# Altium PCB PCB1.PcbDoc
Units mm, origin at the board's own origin, x right, y up, seen from the top; angles counter-clockwise.
Board outline 100.75 x 82 mm, 2 copper layers (Top Layer, Bottom Layer), stack 1.571 mm thick; 98 components, 125 nets, 437 pads, 46 vias.
Unrouted connection lines stored in the file: 3.
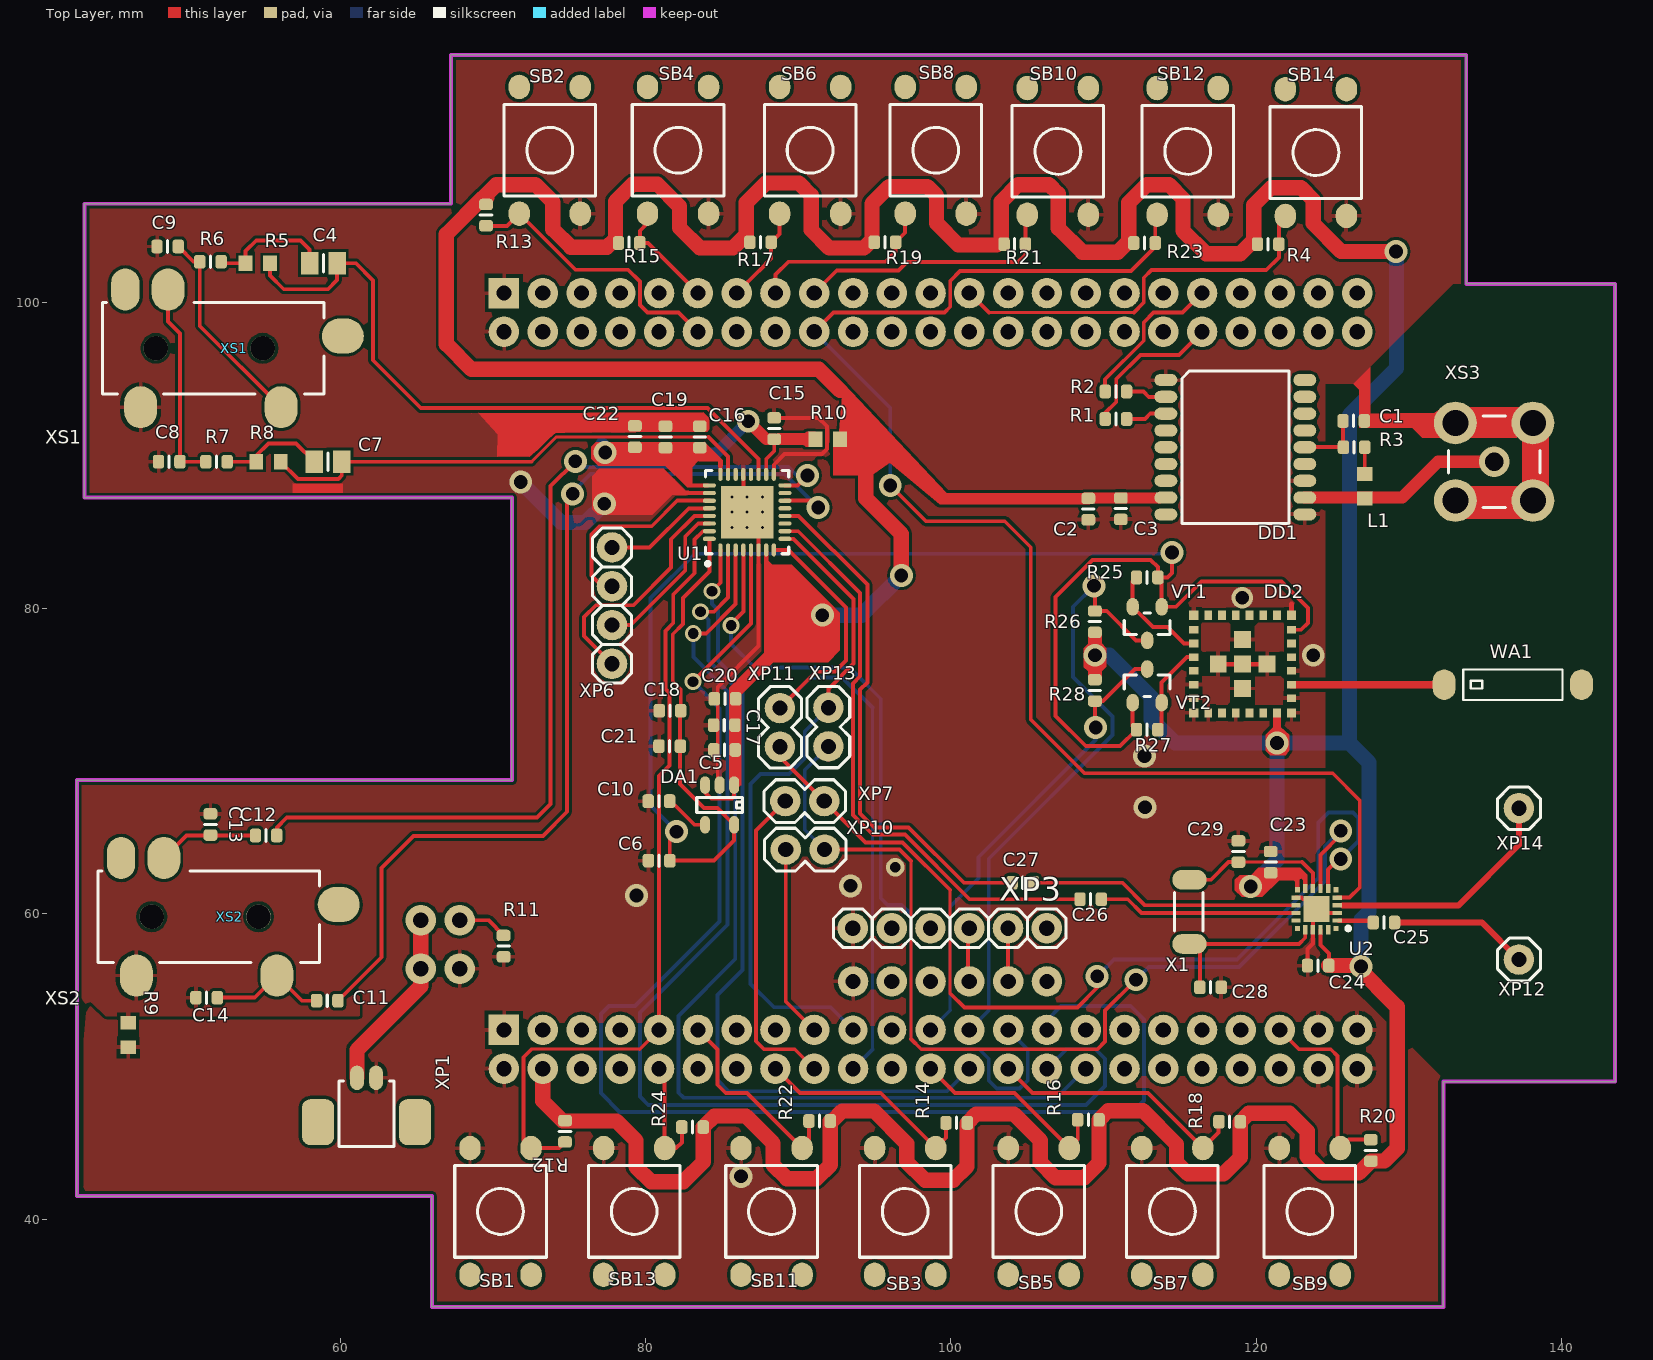
[diagram p0: Top Layer view]
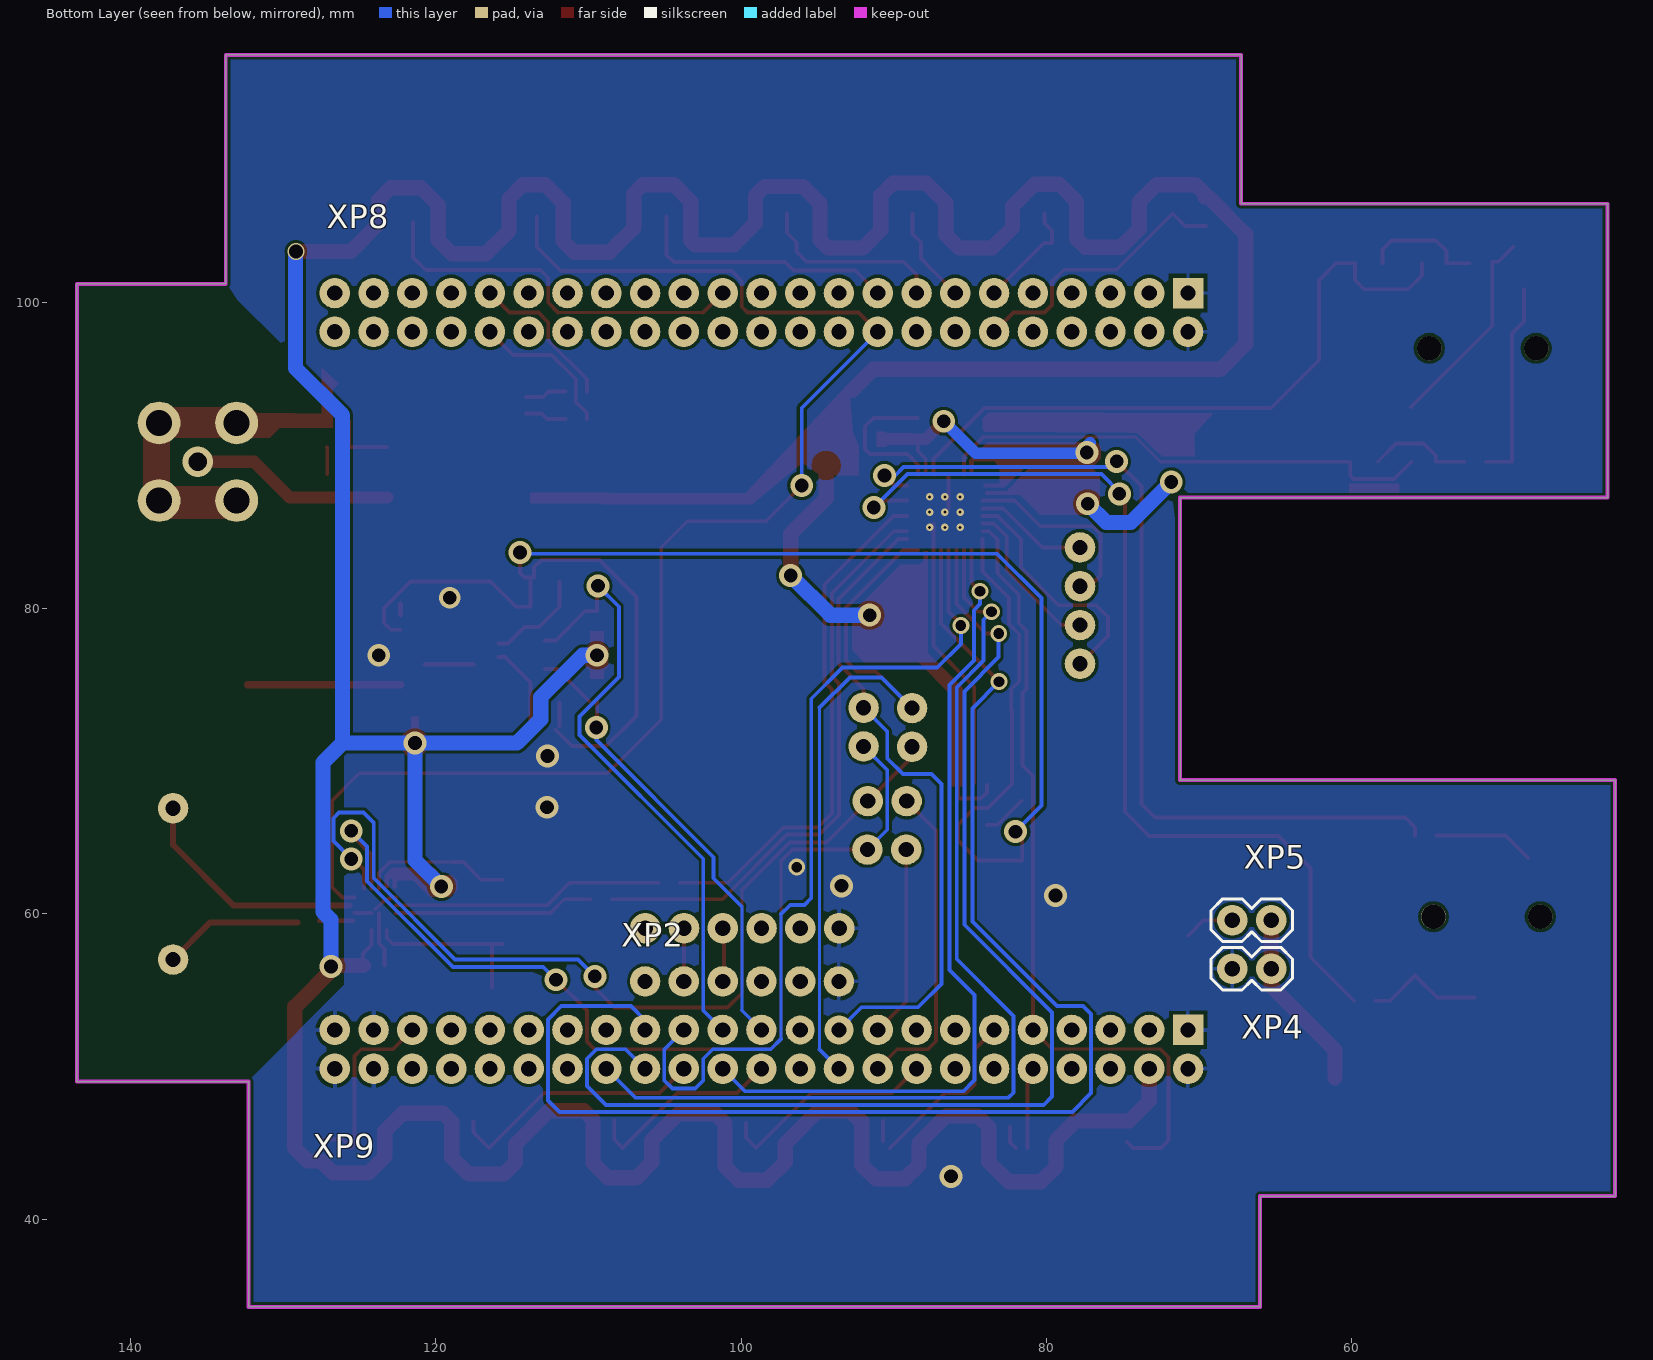
[diagram p1: Bottom Layer view, seen from below]
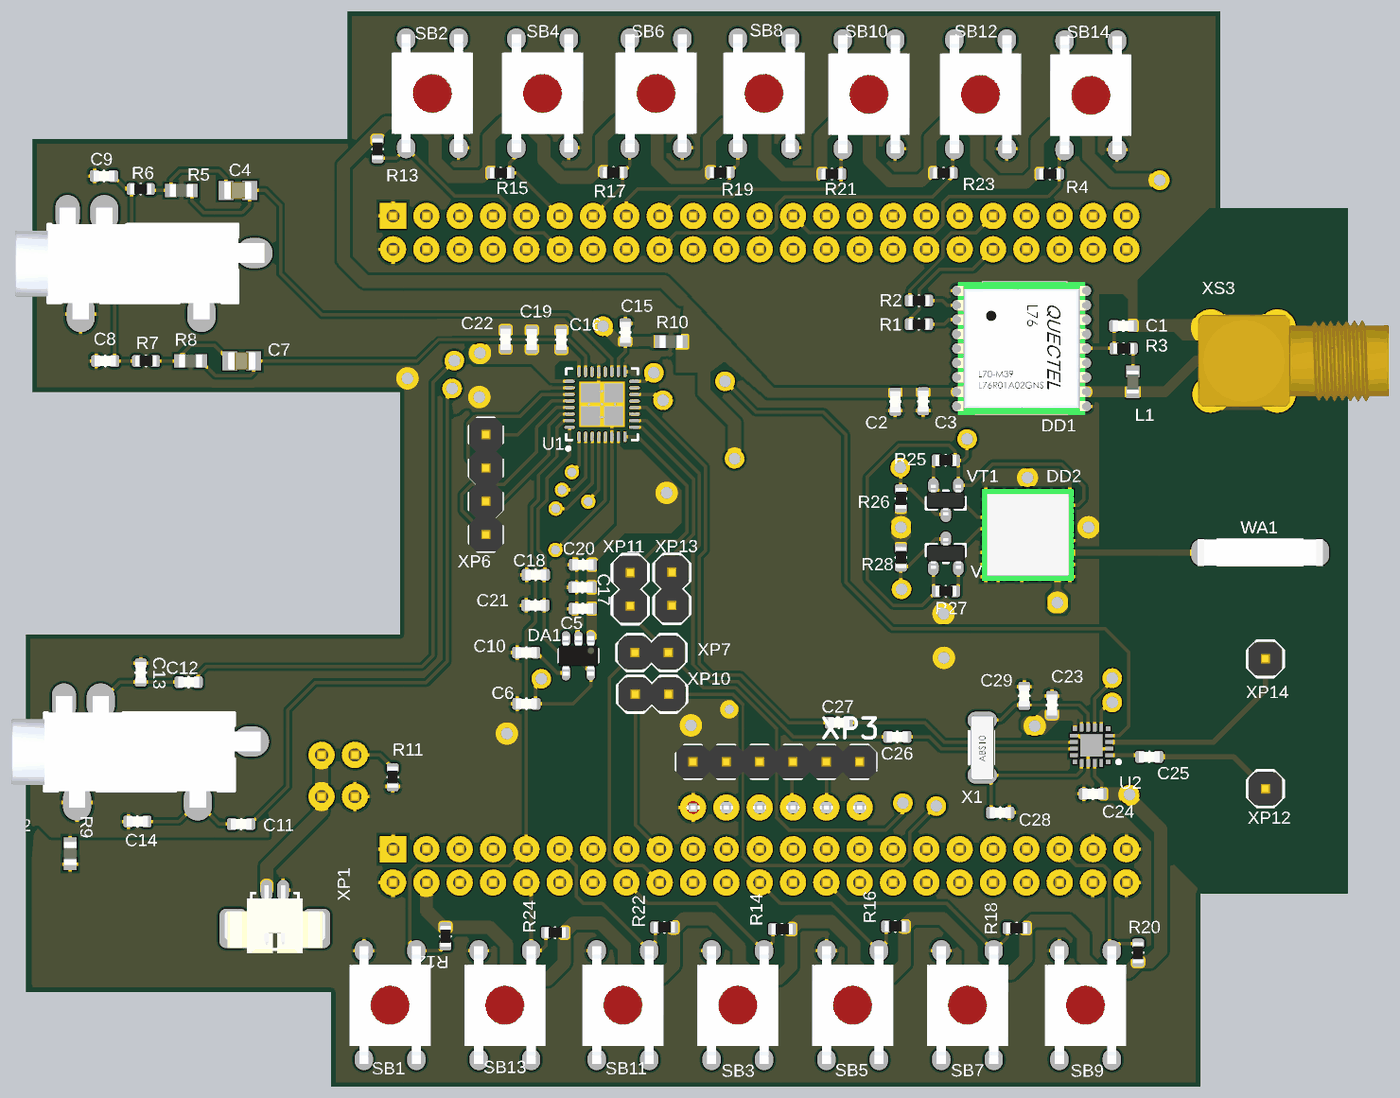
[diagram p2: 3D render of the assembled board from above, using the file's embedded part models]
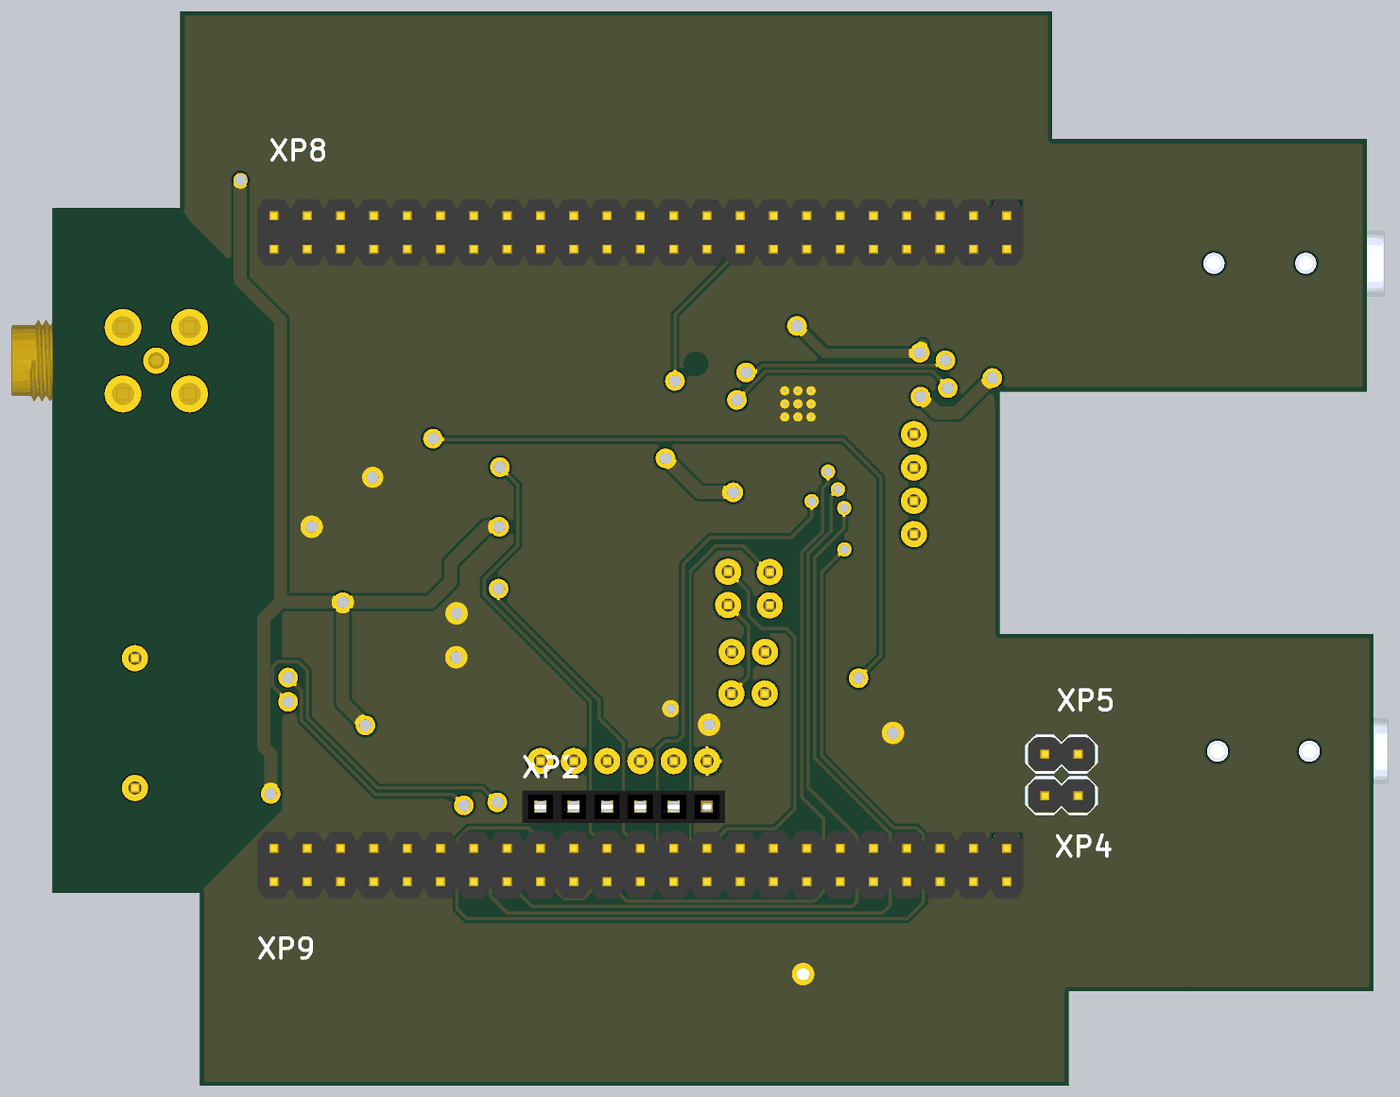
[diagram p3: 3D render of the assembled board from below, using the file's embedded part models]

## Layer stack, top to bottom
Top Solder: solder mask 0.0102, Solder Resist, Dk 3.5
Top Layer: signal copper 0.0356
Dielectric 1: dielectric 1.5, FR-4, Dk 4.8
Bottom Layer: signal copper 0.0356
Bottom Solder: solder mask 0.0102, Solder Resist, Dk 3.5

## Board outline
42.75,41.5 66,41.5 66,34.25 132.25,34.25 132.25,49 143.5,49 143.5,101.25 133.75,101.25 133.75,116.25 67.25,116.25 67.25,106.5 43.25,106.5 43.25,87.25 71.25,87.25 71.25,68.75 42.75,68.75

## Design rules (kind name [scope] priority, off if disabled: settings)
Clearance [All] p1: gap=0.2
PolygonConnect PolygonConnect_1 [IsVia] p1: connectstyle=Direct reliefconductorwidth=0.254 reliefentries=4 polygonreliefangle="90 Angle" airgapwidth=0.254
PolygonConnect [All] p2: connectstyle=Relief reliefconductorwidth=0.254 reliefentries=4 polygonreliefangle="90 Angle" airgapwidth=0.254
RoomDefinition Radio [InComponentClass('Radio')] p1: confinementstyle=ConfineIn formatcopy=TRUE lockcomponents=FALSE outline 0,0 50.8,0 50.8,25.4 0,25.4
RoutingVias [All] p1: holewidth=0.711 width=1.27 viastyle="Through Hole" minholewidth=0.711 minwidth=1.27 maxholewidth=0.711 maxwidth=1.27
SilkToSilkClearance [All] p1: silktosilkclearance=0.2
SolderMaskExpansion [All] p1: expansion=0.102
Width [All] p1: maxlimit=2 minlimit=0.254 preferedwidth=0.254
28 further rules are at their usual default settings.

## Classes and differential pairs
component class Sheet2: DD2 R4 R12 R13 R14 R15 R16 R17 R18 R19 R20 R21 R22 R23 R24 R25 R26 R27 R28 SB1 SB2 SB3 SB4 SB5 SB6 SB7 SB8 SB9 SB10 SB11 SB12 SB13 SB14 VT1 VT2 WA1
component class Sheet1: C4 C5 C6 C7 C8 C9 C10 C11 C12 C13 C14 C15 C16 C17 C18 C19 C20 C21 C22 DA1 R5 R6 R7 R8 R9 R10 R11 U1 XP1 XP2 XP3 XP4 XP5 XP6 XP8 XP9 XS1 XS2
component class GPS: C1 C2 C3 DD1 L1 R1 R2 R3 XS3
component class Radio: C23 C24 C25 C26 C27 C28 C29 U2 X1 XP7 XP10 XP11 XP12 XP13 XP14

## Components (designator, comment, footprint, x,y, rotation, side; value= is the part's Value field where it differs from the comment)
C1 "100nF" CAP0603R 126.375,92.275 r0 top
C2 "100nF" CAP0603R 109,86.5 r270 top
C3 "4.7uF" CAP0603R 111.125,86.525 r90 top
C4 "47uF" CAPC2012X140N 58.9,102.6 r0 top
C5 "1uF" CAP0603R 85.175,70.725 r180 top
C6 "2.2uF" CAP0603R 80.885,63.475 r0 top
C7 "47uF" CAPC2012X140N 59.2,89.6 r0 top
C8 "47pF" CAP0603R 48.8,89.6 r180 top
C9 "47pF" CAP0603R 48.7,103.7 r180 top
C10 "100nF" CAP0603R 80.875,67.375 r0 top
C11 "100nF" CAP0603R 59.15,54.3 r0 top
C12 "100nF" CAP0603R 55.15,65.125 r0 top
C13 "47pF" CAP0603R 51.5,65.85 r90 top
C14 "47pF" CAP0603R 51.25,54.5 r180 top
C15 "10uF" CAP0603R 88.425,91.775 r270 top
C16 "100nF" CAP0603R 83.55,91.225 r90 top
C17 "10uF" CAP0603R 85.15,72.35 r0 top
C18 "10uF" CAP0603R 81.6,73.3 r0 top
C19 "100nF" CAP0603R 81.3,91.225 r90 top
C20 "100nF" CAP0603R 85.2,74.075 r180 top
C21 "100nF" CAP0603R 81.575,70.975 r180 top
C22 "10uF" CAP0603R 79.3,91.25 r270 top
C23 "100nF" CAP0603R 120.938,63.375 r270 top
C24 "22nF" CAP0603R 124.05,56.6 r180 top
C25 "1nF" CAP0603R 128.35,59.425 r180 top
C26 "100nF" CAP0603R 109.15,60.95 r0 top
C27 "100nF" CAP0603R 104.7,62.025 r0 top
C28 "22pF" CAP0603R 117,55.175 r180 top
C29 "22pF" CAP0603R 118.825,64.075 r270 top
DA1 "LDS3985M18R" SOT23-5 84.85,67.125 r270 top
DD1 "SIM68M" SIM68M 118.625,90.55 r180 top
DD2 "TiWi-uB2" TiWi-uB2 116.2,79.675 r270 top
L1 "27NH" INDC1608X75N 127.1,88 r270 top
R1 "100" RES0603R 110.8,92.4 r0 top
R2 "100" RES0603R 110.8,94.2 r180 top
R3 "10" RES0603R 126.4,90.55 r0 top
R4 "10k" RES0603R 120.775,103.85 r180 top
R5 "0" RESC1608X55N 54.6,102.6 r0 top
R6 "33" RES0603R 51.5,102.7 r0 top
R7 "33" RES0603R 51.9,89.6 r0 top
R8 "0" RESC1608X55N 55.3,89.6 r0 top
R9 "0" RESC1608X55N 46.125,52.05 r90 top
R10 "0" RESC1608X55N 91.925,91.075 r180 top
R11 "75k" RES0603R 70.7,57.875 r270 top
R12 "10k" RES0603R 74.725,45.75 r90 top
R13 "10k" RES0603R 69.55,105.75 r90 top
R14 "10k" RES0603R 100.375,46.3 r0 top
R15 "10k" RES0603R 78.925,103.925 r180 top
R16 "10k" RES0603R 109,46.5 r0 top
R17 "10k" RES0603R 87.525,103.975 r180 top
R18 "10k" RES0603R 118.25,46.375 r0 top
R19 "10k" RES0603R 95.675,103.975 r180 top
R20 "10k" RES0603R 127.5,44.5 r270 top
R21 "10k" RES0603R 104.175,103.85 r180 top
R22 "10k" RES0603R 91.4,46.425 r0 top
R23 "10k" RES0603R 112.675,103.925 r180 top
R24 "10k" RES0603R 83.075,46.025 r0 top
R25 "10k" RES0603R 112.85,82.025 r0 top
R26 "10k" RES0603R 109.425,79.125 r270 top
R27 "10k" RES0603R 112.85,72.05 r180 top
R28 "10k" RES0603R 109.425,74.625 r90 top
SB1 "RESET" DTSMW-3.8N 70.5,40.5 r270 top
SB2 "1" DTSMW-3.8N 73.725,110 r90 top
SB3 "LEFT" DTSMW-3.8N 97,40.5 r270 top
SB4 "2" DTSMW-3.8N 82.125,110 r90 top
SB5 "RIGHT" DTSMW-3.8N 105.75,40.5 r270 top
SB6 "3" DTSMW-3.8N 90.775,110 r90 top
SB7 "UP" DTSMW-3.8N 114.5,40.5 r270 top
SB8 "4" DTSMW-3.8N 99,110 r90 top
SB9 "DOWN" DTSMW-3.8N 123.5,40.5 r270 top
SB10 "5" DTSMW-3.8N 107,109.925 r90 top
SB11 "ENTER" DTSMW-3.8N 88.25,40.5 r270 top
SB12 "6" DTSMW-3.8N 115.5,109.925 r90 top
SB13 "POWER" DTSMW-3.8N 79.25,40.5 r270 top
SB14 "6" DTSMW-3.8N 123.9,109.85 r90 top
U1 "TLV320AIC3104IRHBT" RHB32-3450X3450TP 86.65,86.3 r90 top
U2 "Si4705-D60-GM" SLAB-QFN-20-1700x1700TP_V 123.95,60.3 r180 top
VT1 "2N7002" SOT23 112.85,79 r270 top
VT2 "2N7002" SOT23 112.85,74.925 r90 top
WA1 "7488910245" 7488910245 136.8,75 r0 top
X1 "32.768kHz" 5020 115.625,60.125 r90 top
XP1 "FH02MR-SMT" FH02MR-SMT 61.725,49.25 r0 top
XP2 "PBS" PBS-06 99.935,55.565 r0 bottom
XP3 "PLS" PLS-06 99.925,59.05 r0 top
XP4 "PLS" PLS-02 66.55,56.4 r0 bottom
XP5 "PLS" PLS-02 66.55,59.575 r180 bottom
XP6 "PLS" PLS-04 77.8,80.175 r270 top
XP7 "PLS" PLS-02 90.425,67.375 r0 top
XP8 "PLS" PLD-46#1 98.665,99.38 r0 bottom
XP9 "PLS" PLD-46#2 98.665,51.12 r0 bottom
XP10 "PLS" PLS-02 90.45,64.2 r180 top
XP11 "PLS" PLS-02 88.8,72.2 r270 top
XP12 "PLS" PLS-01 137.2,57 r90 top
XP13 "PLS" PLS-02 91.975,72.225 r90 top
XP14 "PLS" PLS-01 137.2,66.9 r90 top
XS1 "PJ-W37-05C" PJ-W37-05C 44.425,97.025 r0 top
XS2 "PJ-W37-05C" PJ-W37-05C 44.15,59.8 r0 top
XS3 "73100-0114" 73100-0114 135.575,89.6 r180 top

## Footprints (in the part's own frame and the unit in brackets; to place one, negate y for a bottom-side part, rotate by r counter-clockwise, add the part's x,y. Pads: shape width x height; smd on the part's side, far side on the other; paste and mask are expansions set on the pad)
5020 [mm]
  oval 1.3x2.25 smd mask+0.1: 1(-2.1,0) 2(2.1,0)
  silkscreen extent -1.25,-0.88 1.25,1, body extent -2.45,-0.9 2.45,0.9, height 1.01
73100-0114 [mm] "Connector; RF Coaxial, MCX, Thru-Hole; 5 Position; Right-Angle"
  round 2 hole 1.2: 1(0,0)
  round 2.8 hole 1.7: 2(-2.54,-2.54) 3(2.54,-2.54) 4(2.54,2.54) 5(-2.54,2.54)
  silkscreen extent -3,-3 3,3, body extent -11,-3.5 3.5,3.5, height 9.91
7488910245 [mm]
  oval 1.5x2 smd: 1(-4.5,0) 2(4.5,0)
  silkscreen extent -3.25,-1 3.25,1, body extent -4.77,-1.02 4.77,1.02, height 1.05
CAP0603R [mm] "capacitor 0603 reflow soldering"
  rrect50% 0.75x0.9 smd: 1(-0.7,0) 2(0.7,0)
  silkscreen extent 0,-0.38 0,0.38, body extent -0.8,-0.4 0.8,0.4, height 0.81
CAPC2012X140N [mm] "Chip Capacitor, Body 2.0x1.25mm, IPC Medium Density"
  rect 1.15x1.45 smd: 1(-0.9,0) 2(0.9,0)
  silkscreen extent 0,-0.58 0,0.57, body extent -1.05,-0.67 1.05,0.68, height 1.3
DTSMW-3.8N [mm] "Surface Mount DTSM Tact Switch; Body 6 x 6 mm (LxW)"
  oval 1.6x1.4 smd mask+0.1: 1(-4.15,2) 2(4.15,2) 3(-4.15,-2) 4(4.15,-2)
  silkscreen extent -3,-3 3,3, body extent -4.49,-3.1 4.49,3.1, height 4.01
FH02MR-SMT [mm]
  oval 0.9x1.6 smd mask+0.1: 1(-0.625,0) 2(0.625,0)
  rrect50% 2.1x3 smd mask+0.1: 3(-3.175,-2.9) 4(3.175,-2.9)
  silkscreen extent -1.8,-4.5 1.8,-0.2, body extent -3.82,-4.8 3.83,0.4, height 3.52
INDC1608X75N [mm] "Chip Inductor, 2-Leads, EIA 0603, Metric 1608, Body 1.6x0.8mm, IPC Medium Density"
  rect 0.9x1 smd: 1(-0.8,0) 2(0.8,0)
  body extent -0.87,-0.47 0.88,0.48, height 0.7
PBS-06 [mm]
  round 2 hole 1 unplated: 1(-6.35,0) 2(-3.81,0) 3(-1.27,0) 4(1.27,0) 5(3.81,0) 6(6.35,0)
  body extent -7.75,-1.25 7.74,1.25, height 8.51
PJ-W37-05C [mm]
  round 1.6 hole 1.6 unplated: 0(3.5,0) 0(10.5,0)
  oval 2.15x2.75 smd: 1(2.5,-3.85) 2(11.7,-3.85) 3(4.3,3.85)
  oval 2.75x2.3 smd: 4(15.75,0.8)
  oval 1.85x2.75 smd: 5(1.5,3.85)
  silkscreen extent 0,-3 14.5,3, body extent -2.5,-4.25 16.5,4.25, height 5.02
PLD-46#1 [mm]
  rect 2x2 hole 1 unplated: 1(-27.94,-1.27)
  round 2 hole 1 unplated: 2(-27.94,1.27) 3(-25.4,-1.27) 4(-25.4,1.27) 5(-22.86,-1.27) 6(-22.86,1.27) 7(-20.32,-1.27) 8(-20.32,1.27) 9(-17.78,-1.27) 10(-17.78,1.27) 11(-15.24,-1.27) 12(-15.24,1.27) 13(-12.7,-1.27) 14(-12.7,1.27) 15(-10.16,-1.27) 16(-10.16,1.27) 17(-7.62,-1.27) 18(-7.62,1.27) 19(-5.08,-1.27) 20(-5.08,1.27) 21(-2.54,-1.27) 22(-2.54,1.27) 23(0,-1.27) 24(0,1.27) 25(2.54,-1.27) 26(2.54,1.27) 27(5.08,-1.27) 28(5.08,1.27) 29(7.62,-1.27) 30(7.62,1.27) 31(10.16,-1.27) 32(10.16,1.27) 33(12.7,-1.27) 34(12.7,1.27) 35(15.24,-1.27) 36(15.24,1.27) 37(17.78,-1.27) 38(17.78,1.27) 39(20.32,-1.27) 40(20.32,1.27) 41(22.86,-1.27) 42(22.86,1.27) 43(25.4,-1.27) 44(25.4,1.27) 45(27.94,-1.27) 46(27.94,1.27)
  body extent -29.21,-2.54 29.21,2.54, height 8.45
PLD-46#2 [mm]
  rect 2x2 hole 1 unplated: 1(-27.94,-1.27)
  round 2 hole 1 unplated: 2(-27.94,1.27) 3(-25.4,-1.27) 4(-25.4,1.27) 5(-22.86,-1.27) 6(-22.86,1.27) 7(-20.32,-1.27) 8(-20.32,1.27) 9(-17.78,-1.27) 10(-17.78,1.27) 11(-15.24,-1.27) 12(-15.24,1.27) 13(-12.7,-1.27) 14(-12.7,1.27) 15(-10.16,-1.27) 16(-10.16,1.27) 17(-7.62,-1.27) 18(-7.62,1.27) 20(-5.08,1.27) 22(-2.54,1.27) 23(0,-1.27) 24(0,1.27) 25(2.54,-1.27) 26(2.54,1.27) 27(5.08,-1.27) 28(5.08,1.27) 29(7.62,-1.27) 30(7.62,1.27) 31(10.16,-1.27) 32(10.16,1.27) 33(12.7,-1.27) 34(12.7,1.27) 35(15.24,-1.27) 36(15.24,1.27) 37(17.78,-1.27) 38(17.78,1.27) 39(20.32,-1.27) 40(20.32,1.27) 41(22.86,-1.27) 42(22.86,1.27) 43(25.4,-1.27) 44(25.4,1.27) 45(27.94,-1.27) 46(27.94,1.27)
  round 1.9 hole 1 unplated: 19(-5.08,-1.27) 21(-2.54,-1.27)
  body extent -29.21,-2.54 29.21,2.54, height 8.45
PLS-01 [mm]
  round 2 hole 1: 1(0,0)
  silkscreen extent -1.4,-1.4 1.4,1.4, body extent -1.27,-1.27 1.27,1.27, height 8.45
PLS-02 [mm]
  round 2 hole 1: 1(-1.27,0) 2(1.27,0)
  silkscreen extent -2.67,-1.4 2.67,1.4, body extent -2.54,-1.27 2.54,1.27, height 8.45
PLS-04 [mm]
  round 2 hole 1: 1(-3.81,0) 2(-1.27,0) 3(1.27,0) 4(3.81,0)
  silkscreen extent -5.08,-1.27 5.08,1.27, body extent -5.08,-1.27 5.08,1.27, height 8.45
PLS-06 [mm]
  round 2 hole 1: 1(-6.35,0) 2(-3.81,0) 3(-1.27,0) 4(1.27,0) 5(3.81,0) 6(6.35,0)
  silkscreen extent -7.62,-1.27 7.62,1.27, body extent -7.62,-1.27 7.62,1.27, height 8.45
RES0603R [mm] "resistor 0603 reflow soldering"
  rrect50% 0.75x0.9 smd: 1(-0.7,0) 2(0.7,0)
  silkscreen extent 0,-0.38 0,0.38, body extent -0.8,-0.4 0.8,0.4, height 0.46
RESC1608X55N [mm] "Chip Resistor, EIA 0603, Metric 1608, Body 1.6x0.8mm, IPC Medium Density"
  rect 0.9x1 smd: 1(-0.8,0) 2(0.8,0)
  body extent -0.87,-0.47 0.88,0.48, height 0.55
RHB32-3450X3450TP [mm] "QFN, 32-Leads, Body 5x5mm, Pitch 0.5mm, Thermal Pad 3.45x3.45mm, TI Recommended"
  oval 0.85x0.28 smd paste-0.025 mask+0.07: 1(-2.475,1.75) 2(-2.475,1.25) 3(-2.475,0.75) 4(-2.475,0.25) 5(-2.475,-0.25) 6(-2.475,-0.75) 7(-2.475,-1.25) 8(-2.475,-1.75) 17(2.475,-1.75) 18(2.475,-1.25) 19(2.475,-0.75) 20(2.475,-0.25) 21(2.475,0.25) 22(2.475,0.75) 23(2.475,1.25) 24(2.475,1.75)
  oval 0.28x0.85 smd paste-0.025 mask+0.07: 9(-1.75,-2.475) 10(-1.25,-2.475) 11(-0.75,-2.475) 12(-0.25,-2.475) 13(0.25,-2.475) 14(0.75,-2.475) 15(1.25,-2.475) 16(1.75,-2.475) 25(1.75,2.475) 26(1.25,2.475) 27(0.75,2.475) 28(0.25,2.475) 29(-0.25,2.475) 30(-0.75,2.475) 31(-1.25,2.475) 32(-1.75,2.475)
  rect 3.45x3.45 smd paste-1.725 mask+0.07: 33(0,0)
  silkscreen extent -3.5,-2.72 2.73,2.72, body extent -2.57,-2.57 2.58,2.58, height 1
SIM68M [mm]
  oval 1.5x0.8 smd: 1(4.55,-4.4) 2(4.55,-3.3) 3(4.55,-2.2) 4(4.55,-1.1) 5(4.55,0) 6(4.55,1.1) 7(4.55,2.2) 8(4.55,3.3) 9(4.55,4.4) 10(-4.55,4.4) 11(-4.55,3.3) 12(-4.55,2.2) 13(-4.55,1.1) 14(-4.55,0) 15(-4.55,-1.1) 16(-4.55,-2.2) 17(-4.55,-3.3) 18(-4.55,-4.4)
  silkscreen extent -3.5,-5 3.5,5, body extent -4.85,-5.05 4.85,5.05, height 2.52
SLAB-QFN-20-1700x1700TP_V [mm] "QFN, 20-Leads, Body 3x3mm, Pitch 0.5mm, Thermal Pad 1.7x1.7mm"
  rect 0.34x0.34 smd: 1(-1.265,1.265) 6(-1.265,-1.265) 11(1.265,-1.265) 16(1.265,1.265)
  rect 0.61x0.28 smd: 2(-1.355,0.75) 3(-1.355,0.25) 4(-1.355,-0.25) 5(-1.355,-0.75) 12(1.355,-0.75) 13(1.355,-0.25) 14(1.355,0.25) 15(1.355,0.75)
  rect 0.28x0.61 smd: 7(-0.75,-1.355) 8(-0.25,-1.355) 9(0.25,-1.355) 10(0.75,-1.355) 17(0.75,1.355) 18(0.25,1.355) 19(-0.25,1.355) 20(-0.75,1.355)
  rect 1.7x1.7 smd: 21(0,0)
  silkscreen extent -2.19,1.14 -1.94,1.39, body extent -1.5,-1.5 1.5,1.5, height 0.6
SOT23 [mm]
  oval 1.15x0.8 smd mask+0.1: 1(-1.1,0.95) 2(-1.1,-0.95) 3(1.1,0)
  silkscreen extent -0.7,-1.5 0.7,1.5, body extent -1.16,-1.46 1.18,1.46, height 1
SOT23-5 [mm] "SOT23, 5-Leads, Body 2.9x1.6mm, Pitch 0.95mm, Lead Span 2.8mm, IPC High Density"
  oval 1.15x0.65 smd mask+0.1: 1(-1.3,0.95) 2(-1.3,0) 3(-1.3,-0.95) 4(1.3,-0.95) 5(1.3,0.95)
  silkscreen extent -0.5,-1.5 0.5,1.5, body extent -1.5,-1.5 1.5,1.5, height 1.3
TiWi-uB2 [mm]
  rect 0.5x0.6 smd: 1(1.075,-0.3) 2(1.975,-0.3) 3(2.875,-0.3) 4(3.775,-0.3) 5(4.675,-0.3) 6(5.575,-0.3) 13(5.575,6.1) 14(4.675,6.1) 15(3.775,6.1) 16(2.875,6.1) 17(1.975,6.1) 18(1.075,6.1)
  rect 0.6x0.5 smd: 7(6.525,0.65) 8(6.525,1.55) 9(6.525,2.45) 10(6.525,3.35) 11(6.525,4.25) 12(6.525,5.15) 19(0.125,5.15) 20(0.125,4.25) 21(0.125,3.35) 22(0.125,2.45) 23(0.125,1.55) 24(0.125,0.65)
  rect 1.1x1.1 smd: 25(3.325,1.3) 26(1.725,2.9) 27(3.325,2.9) 28(4.925,2.9) 29(3.325,4.5)
  rect 0.6x0.6 smd: 30(0.125,-0.3) 31(6.525,-0.3) 32(6.525,6.1) 33(0.125,6.1)
  body extent -0.17,-0.6 6.83,6.4, height 1.5

## Part data
C1 C2 C10 C11 C12 C16 C19 C20 C21 C23 C26 C27: library part CC0603_100NF_50V_10%_X7R, "SMD 0805 Capacitor"
C3: library part CC0603_4.7UF_6.3V_10%_X5R, "SMD 0805 Capacitor"
C4 C7: library part CC0805_47UF_6.3V_20%_X5R, "Non-polarised capacitor"
C5: library part CC0603_1UF_16V_10%_X7R, "SMD 0805 Capacitor"
C6: library part CC0603_2.2UF_6.3V_10%_X5R, "SMD 0805 Capacitor"
C8 C9 C13 C14: library part CC0603_47PF_50V_5%_NP0, "SMD 0805 Capacitor"
C15 C17 C18 C22: library part CC0603_10UF_6.3V_20%_X5R, "SMD 0805 Capacitor"
C24: library part CC0603_22NF_50V_10%_X7R, "SMD 0805 Capacitor"
C25: library part CC0603_1NF_50V_10%_X7R, "SMD 0805 Capacitor"
C28 C29: library part CC0603_22PF_50V_5%_NP0, "SMD 0805 Capacitor"
L1: library part IND0603_TDK_MMZ1608B601C, "Inductor"
R1 R2: library part R0603_100R_1%_0.1W_100PPM
R3: library part R0603_10R_1%_0.1W_200PPM
R4 R12 R13 R14 R15 R16 R17 R18 R19 R20 R21 R22 R23 R24 R25 R26 R27 R28: library part R0603_10K_1%_0.1W_100PPM
R5 R8 R9 R10: library part R0603_0R_JUMPER, "Resistor"
R6 R7: library part R0603_33R_1%_0.1W_100PPM
R11: library part R0603_75K_1%_0.1W_100PPM
SB1 SB2 SB3 SB4 SB5 SB6 SB7 SB8 SB9 SB10 SB11 SB12 SB13 SB14: library part DTSMW-3.8N
U1: library part CMP-0331-00065-1, "Low-Power Stereo CODEC with 6 Inputs, 6 Outputs, HP Amp and Enhanced Digital Effects, 2 ADCs and 2 DACs, 102 dB DAC SNR, -40 to 85 degC, 32-pin QFN (RHB), Green (RoHS & no Sb/Br)"
U2: library part CMP-0501-00017-1, "Broadcast FM Radio Receiver with RDS / RBDS, -20 to 85 degC, 20-pin QFN, Tray"
VT1 VT2: "N-Channel Enhancement Mode FET"
WA1: "Bluetooth Antenna"
X1: library part CC4V-T1A, "Кварцевый резонатор"
XP2: library part PBS-06
XP3: library part PLS-06
XP4 XP5 XP7 XP10 XP11 XP13: library part PLS-02
XP6: library part PLS-04
XP8 XP9: library part PLD-46
XP12 XP14: library part PLS-01
XS1 XS2: "3.5 mm Jack Connector"
XS3: "RF Coaxial PCB Connector, MCX; Thru-Hole, Right-Angle Mount Socket, Blunt Post Terminal, 50 Ohm Impedance"

## Via types
v1: diameter 1.5/1.5 (per signal layer), hole 0.9, Top Layer to Bottom Layer, 29 vias
v2: diameter 0.5, hole 0.2, Top Layer to Bottom Layer, 9 vias
v3: diameter 1.1/1.1 (per signal layer), hole 0.7, Top Layer to Bottom Layer, 5 vias
v4: diameter 1.5/1.1 (per signal layer), hole 0.9, Top Layer to Bottom Layer, 1 vias
v5: diameter 1.4/1.4 (per signal layer), hole 0.9, Top Layer to Bottom Layer, 1 vias
v6: diameter 1.2/1.1 (per signal layer), hole 0.7, Top Layer to Bottom Layer, 1 vias

## Nets (pads, with @x,y where several pads share a name; then routed paths per layer and width w, separated by ;. In a path a pad name is that pad's centre, name@x,y a point inside that pad or via, vN(x,y) a via of type N, cw(c..) or ccw(c..) an arc to the next point about the centre after c; other vN are vias at no path point)
1.8V: C6.2 C18.2 C21.1 DA1.5 DD2.18 R25.2 R27.2 U1.32 VT1.1 VT2.1 | length 122.9
  Top Layer w0.254: v1(82.025,65.375) 81.585,64.935 C6.2 84.475,63.475 85.8,64.8 DA1.5 84.7,66.925 83.825,66.925 82.25,68.5 C18.2@82.25,73.3 ; C18.2 82.3,74.7 81.775,75.225 81.775,78.3 82.45,78.975 82.45,80.675 84.175,82.4 U1.32 ; R27.2@111.9,72.3 VT2.1 ; R27.2 111.075,70.975 108.825,70.975 106.85,72.95 106.85,80.75 109.275,83.175 113.075,83.175 113.55,82.7 R25.2 114.175,82.025 114.475,82.325 v1(114.475,83.65) ; R25.2@113.8,81.775 VT1.1 114.75,80.1 116.4,81.75 121.65,81.75 123.375,80.025 123.375,79.05 122.925,78.6 DD2.18
  Bottom Layer w0.254: v1(82.025,65.375) 80.325,67.075 80.325,80.675 83.225,83.575 v1@114.475,83.575
AGND: C8.2 C9.2 C13.2 C14.2 C15.1 C16.2 C19.2 C22.1 R9.2 U1.17 U1.26 XS1.1 XS2.1 | length 16.8
  Top Layer w0.254: U1.17 88.4,89.4 89.1,90.1 91.55,90.1 91.875,90.425 91.875,91.925 91.325,92.475 C15.1
  Bottom Layer w1: v1(71.825,88.275) 74.475,85.625 76.075,85.625 v1(77.3,86.85)
AIN0: XP9.40
AIN1: XP9.39
AIN2: XP9.38
AIN3: XP9.37
AIN4: XP9.34
AIN5: XP9.35
AIN6: XP9.36
ANT: DD1.11 L1.2 XS3.1 | length 13.4
  Top Layer w0.8: DD1.11 129.55,87.25 131.9,89.6 XS3.1
AUD_3.3V: C15.2 C16.1 C19.1 C22.2 R10.2 U1.18 U1.24 U1.25 | length 21.8
  Top Layer w0.254: v1(77.35,90.2) 77.7,90.55 C22.2 81.275,90.55 C19.1 C16.1 ; U1.18 87.9,89.775 88.425,90.3 C15.2
  Top Layer w0.75: v1(86.725,92.25) 87.9,91.075 C15.2
  Bottom Layer w0.75: v1@77.125,90.85 77.825,90.15 84.625,90.15 v1(86.725,92.25)
AUD_HPLOUT: C4.2 R5.2 U1.19 | length 43.9
  Top Layer w0.254: R5.2 55.4,101.8 56.3,100.9 59.2,100.9 59.8,101.5 C4.2 61.025,102.6 62.15,101.475 62.15,96.25 65.275,93.125 84.05,93.125 87.4,89.775 U1.19
AUD_HPROUT: C7.2 R8.2 U1.23 | length 33.1
  Top Layer w0.2: 72.525,89.6 74.15,91.225 84.125,91.225
  Top Layer w0.254: R8.2 57.225,88.475 59.875,88.475 60.1,88.7 C7.2 72.525,89.6 ; 84.125,91.225 85.4,89.95 U1.23
BATT+: XP1.1 XP4.1 XP5.2 | length 12.1
  Top Layer w1: XP1.1 61.1,51.075 65.28,55.255 XP4.1 XP5.2
BT_ANT: DD2.14 WA1.1 | length 10
  Top Layer w0.5: DD2.14 WA1.1
BT_RXD: DD2.3 R27.1 VT2.2 | length 5.6
  Top Layer w0.254: R27.1@113.8,72.3 VT2.2 113.8,75.15 115.45,76.8 DD2.3
BT_TXD: DD2.2 R25.1 VT1.2 | length 6.7
  Top Layer w0.254: R25.1@111.9,81.775 VT1.2 113.225,78.775 114.175,78.775 115.25,77.7 DD2.2
CLKOUT2: XP9.42
DEBUG_RX: XP2.4 XP3.4 | length 3.5
  Top Layer w0.254: XP3.4@101.12,59.05 101.12,55.65 XP2.4
DEBUG_TX: XP2.5 XP3.5 | length 3.5
  Top Layer w0.254: XP3.5@103.66,59.05 103.745,58.965 XP2.5
DGND: C1.2 C2.2 C3.1 C5.2 C6.1 C10.1 C17.1 C18.1 C20.2 C21.2 C23.1 C24.2 C28.1 C29.1 DA1.2 DD1.1 DD1.10 DD1.12 DD2.5 DD2.6 DD2.7 DD2.9 DD2.13 DD2.15 DD2.25 DD2.26 DD2.27 DD2.28 DD2.29 DD2.30 DD2.31 DD2.32 DD2.33 R9.1 R11.2 SB1.3 SB2.3 SB3.3 SB4.3 SB5.3 SB6.3 SB7.3 SB8.3 SB9.3 SB10.3 SB11.3 SB12.3 SB13.3 SB14.3 U1.6 U1.21 U1.33 U2.3 U2.12 U2.18 U2.21 XP1.2 XP2.1 XP3.1 XP4.2 XP8.1 XP8.2 XP9.1 XP9.2 XP9.43 XP9.44 XP9.45 XP9.46 XS3.2 XS3.3 XS3.4 XS3.5 | length 30.6
  Top Layer w0.254: DA1.2@84.725,68.55 84.725,74.85 87.4,77.525 U1.6 U1.33@87.4,85.55 ; U1.33@86.4,86.55 U1.21 ; U2.12 122.95,61.05 123.05,60.95 123.275,60.95 123.925,60.3 U2.21 ; C24.2 123.35,57.7 123.7,58.05 U2.18 U2.21@123.7,60.05 ; U2.21@124.2,60.05 U2.3
  Top Layer w0.3: DD2.25 DD2.27 DD2.29 ; DD2.33 122.3,80.3
  other v1: 86.25,42.8 79.4,61.2 93.425,61.825 112.7,66.975 112.675,70.325 123.725,76.925
  other v2: 85.65,85.3 86.65,85.3 87.65,85.3 85.65,86.3 86.65,86.3 87.65,86.3 85.65,87.3 86.65,87.3 87.65,87.3
  other v5: 119.075,80.7
  other v6: 96.35,63.05
EHRPWM1A: XP9.13
EHRPWM1B: XP9.15
EHRPWM2A: XP8.20
EHRPWM2B: XP8.14
FM_ANT: C25.2 U2.2 | length 2.2
  Top Layer w0.3: U2.2@125.405,59.55 C25.2@127.625,59.55
FM_LEFT: C26.1 U1.10 | length 38.5
  Top Layer w0.254: U1.10 90,85.05 94.05,81 94.05,75.55 93.575,75.075 93.575,66.475 94.875,65.175 97,65.175 101.225,60.95 C26.1
FM_RIGHT: C27.1 U1.12 | length 34.3
  Top Layer w0.254: U1.12 90.025,86.05 94.525,81.55 94.525,75.15 94.05,74.675 94.05,66.575 94.975,65.65 97.225,65.65 100.85,62.025 C27.1
GNDA_ADC: XP9.33
GPIO0_7: R20.1 SB9.1 XP9.41 | length 12.8
  Top Layer w0.254: XP9.41 122.79,51.125 124.875,51.125 125.325,50.675 125.325,44.825 SB9.1 126.05,45.2 R20.1
GPIO0_26: R17.1 SB6.1 XP8.13 | length 7.2
  Top Layer w0.254: XP8.13@85.965,101.51 XP8.13 87.44,102.125 87.45,102.125 88.225,102.9 R17.1 88.775,104.525 SB6.1
GPIO0_27: R23.1 SB12.1 U2.5 XP8.18 | length 93.1
  Top Layer w0.254: XP8.18 92.31,99.375 99.575,99.375 99.95,99.75 99.95,101.45 100.6,102.1 111.8,102.1 113.375,103.675 R23.1 SB12.1@113.375,105.65 ; v1(96.025,88.05) 98.375,85.7 103.525,85.7 105.225,84 105.225,72.725 108.75,69.2 125,69.2 126.775,67.425 126.775,61.725 126.1,61.05 U2.5
  Bottom Layer w0.254: XP8.18 96.025,93.13 v1(96.025,88.05)
GPIO1_12: R15.1 SB4.1 XP8.11 | length 7.3
  Top Layer w0.254: SB4.1 80.125,105.225 79.625,104.725 R15.1 80.15,103.925 XP8.11
GPIO1_13: R13.1 SB2.1 XP8.12 | length 18.3
  Top Layer w0.254: R13.1 70.925,105.05 SB2.1 75.4,102.175 78.85,102.175 79.625,101.4 79.625,99.875 80.125,99.375 82.16,99.375 XP8.12
GPIO1_14: R19.1 SB8.1 XP8.15 | length 12.4
  Top Layer w0.254: XP8.15 88.505,101.855 89.35,102.7 95.7,102.7 96.375,103.375 R19.1 97,104.6 SB8.1
GPIO1_15: XP8.16
GPIO1_16: R14.1 SB3.1 XP9.16 | length 14.6
  Top Layer w0.254: XP9.16 90.105,48.25 95.4,48.25 SB3.1 99.675,45.325 R14.1
GPIO1_17: R16.1 SB5.1 XP9.24 | length 13.3
  Top Layer w0.254: XP9.24 100.265,48.25 104.15,48.25 SB5.1 108.3,45.2 R16.1
GPIO1_28: R22.1 SB11.1 XP9.11 | length 12.7
  Top Layer w0.254: XP9.11 84.7,51.115 84.7,48.8 85.25,48.25 86.65,48.25 SB11.1 ; SB11.1@90.7,45.1 R22.1
GPIO1_29: R4.1 SB14.1 XP8.25 | length 26
  Top Layer w0.2: 102.48,99.375 111.975,99.375
  Top Layer w0.254: XP8.25@101.205,101.13 XP8.25 102.48,99.375 ; 111.975,99.375 112.625,100.025 112.625,101.65 113.125,102.15 120.65,102.15 121.475,102.975 R4.1 SB14.1@121.475,105.275
GPIO2_1: R21.1 SB10.1 XP8.17 | length 17.4
  Top Layer w0.254: XP8.17@91.125,100.65 XP8.17 92.52,102.125 96.575,102.125 97.125,102.675 104.4,102.675 104.875,103.15 R21.1 SB10.1@104.875,105.65
GPIO3_19: R18.1 SB7.1 XP9.28 | length 17.1
  Top Layer w0.254: XP9.28 105.345,48.25 112.9,48.25 SB7.1 117.525,45.675 117.525,46.35 R18.1
GPIO3_21: U1.1 XP9.26 | length 53.9
  Top Layer w0.254: v3(84.35,81.125) 84.9,81.675 U1.1
  Bottom Layer w0.254: v3(84.35,81.125) 84.35,80.275 84.75,79.875 84.75,76.575 86.35,74.975 86.35,56.325 84.7,54.675 84.7,49.1 85.425,48.375 99.73,48.375 XP9.26
GPO3: C28.2 U2.17 X1.1 | length 11.1
  Top Layer w0.254: X1.1 122.8,58.025 123.2,58.425 U2.17 ; C28.2 X1.1@116.3,58
I2C1_SCL: XP7.1 XP9.18 | length 21.1
  Top Layer w0.254: XP7.1 87.225,65.445 87.225,51.65 87.75,51.125 89.77,51.125 XP9.18
I2C1_SDA: XP9.17 XP10.2 | length 12.6
  Top Layer w0.254: XP10.2 89.18,54.255 XP9.17
I2C2_SCL: U1.8 XP9.20 XP11.1 | length 47.6
  Top Layer w0.254: U1.8 89.35,83.825 93.125,80.05 93.125,76.575 92.4,75.85 91.18,75.85 XP11.1 XP11.1@88.8,73.8
  Bottom Layer w0.2: 94.85,51.115 94.85,73.5
  Bottom Layer w0.254: XP11.1 90.805,75.475 92.875,75.475 94.85,73.5 ; XP9.20 94.85,51.115
I2C2_SDA: U1.9 XP9.19 XP13.2 | length 43.2
  Top Layer w0.254: U1.9 89.675,84.55 93.625,80.6 93.625,76.375 91.975,74.725 XP13.2
  Bottom Layer w0.254: XP13.2 90.425,71.945 90.425,70.175 89.4,69.15 87.525,69.15 86.875,68.5 86.875,55.4 88.4,53.875 92.1,53.875 XP9.19
LCD_DATA0: XP8.46
LCD_DATA1: XP8.45
LCD_DATA2: XP8.44
LCD_DATA3: XP8.43
LCD_DATA4: XP8.42
LCD_DATA5: XP8.41
LCD_DATA6: XP8.40
LCD_DATA7: XP8.39
LCD_DATA8: XP8.38
LCD_DATA9: XP8.37
LCD_DATA10: XP8.35
LCD_DATA11: XP8.33
LCD_DATA12: XP8.36
LCD_DATA13: XP8.34
LCD_DATA14: XP8.32
LCD_DATA15: XP8.31
LCD_DE: XP8.29
LCD_HSYNC: XP8.30
LCD_PCLK: XP8.27
LCD_VSYNC: XP8.28
LEFT_LOM: U1.28 XP6.1 | length 7.4
  Top Layer w0.254: XP6.1 80.26,83.985 82.825,86.55 U1.28
LEFT_LOP: U1.27 XP6.2 | length 13
  Top Layer w0.254: XP6.2 77.155,81.445 76.45,82.15 76.45,84.85 76.975,85.375 80.4,85.375 82.075,87.05 U1.27
LINE1LP: C11.2 U1.14 | length 63.9
  Top Layer w0.254: C11.2 62.7,57.15 62.7,63 64.8,65.1 73.275,65.1 74.85,66.675 v1@74.85,87.125 ; U1.14 90.85,87.05 v1(91.3,86.6)
  Bottom Layer w0.254: v1@75.163,87.563 76.4,88.8 89.1,88.8 v1(91.3,86.6)
  other v1: 75.225,87.5
LINE1RP: C12.2 U1.16 | length 59.5
  Top Layer w0.254: C12.2 55.85,65.65 56.5,66.3 72.9,66.3 73.775,67.175 73.775,88 v1(75.4,89.625) ; U1.16 89.95,88.05 v1(90.6,88.7)
  Bottom Layer w0.254: v1@75.45,89.65 75.85,89.25 89.35,89.25 89.9,88.7 v1(90.6,88.7)
LPI_ANT: U2.4 XP14.1 | length 15.6
  Top Layer w0.4: 125.65,60.55 133.25,60.55 137.2,64.5 XP14.1
MMC1_CLK: XP8.22
MMC1_CMD: XP8.19 | length 0.8
  Top Layer w0.254: XP8.19 XP8.19@93.585,101.485
MMC1_DAT0: XP8.26
MMC1_DAT1: XP8.23
MMC1_DAT2: XP8.6
MMC1_DAT3: XP8.5
MMC1_DAT4: XP8.24
MMC1_DAT5: XP8.21
MMC1_DAT6: XP8.4
MMC1_DAT7: XP8.3
NetC4_1: C4.1 R5.1 R6.2 | length 7.9
  Top Layer w0.254: R6.2@52.3,102.6 R5.1 53.8,103.4 54.5,104.1 57.4,104.1 58,103.5 C4.1
NetC7_1: C7.1 R7.2 R8.1 | length 6.9
  Top Layer w0.254: R7.2 R8.1 54.5,90 55.3,90.8 57.1,90.8 C7.1
NetC8_1: C8.1 R7.1 XS1.3 | length 13.3
  Top Layer w0.254: XS1.3 48.725,98.775 49.5,98 C8.1 ; C8.1 R7.1
NetC9_1: C9.1 R6.1 XS1.2 | length 13.5
  Top Layer w0.254: C9.1 50.4,102.7 R6.1 50.8,98.5 XS1.2
NetC10_2: C10.2 DA1.4 | length 2.9
  Top Layer w0.254: C10.2@81.625,67.4 83.2,65.825 DA1.4
NetC11_1: C11.1 C14.1 XS2.2 | length 7.8
  Top Layer w0.254: C14.1 54.4,54.5 XS2.2 57.5,54.3 C11.1
NetC12_1: C12.1 C13.1 XS2.3 | length 6.6
  Top Layer w0.254: XS2.3 49.925,65.125 C12.1
NetC25_1: C25.1 XP12.1 | length 9.1
  Top Layer w0.4: C25.1 134.775,59.425 ; 134.8,59.4 XP12.1
NetC26_2: C26.2 U2.14 | length 13.1
  Top Layer w0.254: C26.2 111.575,60.95 112.475,60.05 U2.14
NetC27_2: C27.2 U2.13 | length 17.8
  Top Layer w0.254: C27.2 111.225,62.025 112.7,60.55 U2.13
NetL1_1: L1.1 R3.2 | length 1.8
  Top Layer w0.254: L1.1 R3.2 R3.2@127.125,90.55
NetR11_1: R11.1 XP5.1 | length 3.3
  Top Layer w0.254: XP5.1 69.7,59.575 R11.1
NetU2_7: U2.7 XP7.2 XP11.2 | length 62.8
  Top Layer w0.2: 99.95,54.775 99.95,61.55
  Top Layer w0.254: XP11.2 88.8,70.27 XP7.2 94.395,64.675 96.825,64.675 99.95,61.55 ; 99.95,54.775 100.875,53.85 108.275,53.85 109.575,55.15 v1(109.575,55.9) ; U2.7 124.7,62.9 v1@125.475,63.675
  Bottom Layer w0.254: v1(109.575,55.9) 110.675,57 118.725,57 124.05,62.325 124.05,65.95 124.725,66.625 126.325,66.625 126.7,66.25 126.7,64.75 v1(125.525,63.575)
NetU2_8: U2.8 XP10.1 XP13.1 | length 67.2
  Top Layer w0.2: 97.375,51.8 97.375,63.45
  Top Layer w0.254: XP10.1 96.625,64.2 97.375,63.45 ; XP13.1@91.975,70.105 XP13.1 ; 97.375,51.8 98.05,51.125 109.6,51.125 110.1,51.625 110.1,53.65 v1(112.125,55.675) ; U2.8 124.2,63.85 v1@125.525,65.175
  Bottom Layer w0.254: XP10.1 90.425,65.495 90.425,69.405 XP13.1 ; v1(112.125,55.675) 112.95,56.5 118.875,56.5 124.5,62.125 124.5,64.4 125.275,65.175 v1@125.525,65.175
  other v1: 125.525,65.425
PWR_BUT: R24.1 SB13.1 XP9.10 | length 6.9
  Top Layer w0.254: XP9.10 81.25,49.485 SB13.1 ; 82,44.65 82.375,45.025 R24.1
RCLK: C29.2 U2.9 X1.2 | length 9.9
  Top Layer w0.2: C29.2@118.875,63.375 123,63.375
  Top Layer w0.254: X1.2 117.025,62.225 118.175,63.375 C29.2@118.875,63.375 ; 123,63.375 123.7,62.675 U2.9
RIGHT_LOP: U1.29 XP6.4 | length 15.8
  Top Layer w0.254: XP6.4 75.975,78.19 75.975,79.425 76.75,80.2 79.2,80.2 81.675,82.675 81.675,84.525 83.2,86.05 U1.29
RIGHT_ROM: U1.30 XP6.3 | length 10.4
  Top Layer w0.254: XP6.3 79.03,78.905 82.6,82.475 82.6,84.7 83.45,85.55 U1.30
RXD1: DD1.3 R1.2 | length 2.7
  Top Layer w0.254: R1.2 112.7,92.4 113.05,92.75 DD1.3
SPI1_CS0: U1.5 XP9.29 | length 91.5
  Top Layer w0.254: v3(83.1,75.2) 86.9,79 U1.5
  Bottom Layer w0.254: v3(83.1,75.2) 84.85,73.45 84.85,59.5 79.3,53.95 77.6,53.95 77.075,53.425 77.075,48.25 78.3,47.025 111.9,47.025 112.65,47.775 112.65,53.075 111.775,53.95 107.21,53.95 106.285,53.025 XP9.29
SPI1_DI: U1.4 XP9.27 | length 55.3
  Top Layer w0.254: v3@85.487,78.887 86.4,79.8 U1.4
  Bottom Layer w0.2: 97.375,51.8 97.375,59.975
  Bottom Layer w0.254: v3(85.6,78.875) 85.6,77.675 87.15,76.125 93.35,76.125 95.4,74.075 95.4,61.025 95.85,60.575 96.775,60.575 97.375,59.975 ; 97.375,51.8 98.05,51.125 101.85,51.125 102.475,50.5 102.475,49.075 103,48.55 104.5,48.55 105.025,49.075 105.025,51.11 XP9.27
SPI1_DO: U1.3 XP9.30 | length 78.4
  Top Layer w0.254: v3(83.125,78.35) 83.975,78.35 85.9,80.275 U1.3
  Bottom Layer w0.254: v3(83.125,78.35) 83.125,76.8 85.375,74.55 85.375,59.275 79.625,53.525 79.625,48.025 80.175,47.475 108.85,47.475 110.1,48.725 110.1,50.5 109.475,51.125 107.56,51.125 XP9.30
SPI1_SCLK: U1.2 XP9.32 | length 66.9
  Top Layer w0.254: v3(83.6,79.775) 84.475,79.775 85.4,80.7 U1.2
  Bottom Layer w0.254: v3(83.6,79.775) 84.125,79.25 84.125,76.575 85.875,74.825 85.875,57.025 82.15,53.3 82.15,48.275 82.475,47.95 106.925,47.95 XP9.32
SYS_5V: XP9.7 XP9.8
SYS_RESETN: R12.1 SB1.1 U1.31 XP9.9 | length 52.7
  Top Layer w0.2: 72.525,51.125 79.62,51.125
  Top Layer w0.254: 72.525,51.125 72,50.6 72,45.15 SB1.1 74.325,44.65 R12.1 ; 79.62,51.125 XP9.9 80.885,69.01 81.575,69.7 81.575,74.45 81.3,74.725 81.3,78.525 81.812,79.037 81.812,80.912 83.2,82.3 83.2,84.5 83.75,85.05 U1.31
TIMER4: XP8.8
TIMER5: XP8.10
TIMER6: XP8.9
TIMER7: XP8.7
TXD1: DD1.2 R2.1 | length 2.7
  Top Layer w0.254: R2.1 112.6,94.2 112.95,93.85 DD1.2
UART1_RXD: R26.1 VT1.3 XP9.25 | length 40.4
  Top Layer w0.254: v1@109.425,81.425 R26.1 110.2,79.825 112.125,77.9 VT1.3
  Bottom Layer w0.2: 102.475,53.66 102.475,63.6
  Bottom Layer w0.254: XP9.25 102.475,53.66 ; 102.475,63.6 110.575,71.7 110.575,72.925 108,75.5 108,80.1 v1(109.375,81.475)
UART1_TXD: R28.1 VT2.3 XP9.23 | length 29.7
  Top Layer w0.254: v1@109.425,72.25 R28.1 ; 109.95,73.925 112.05,76.025 VT2.3
  Bottom Layer w0.2: 99.95,53.675 99.95,60.475
  Bottom Layer w0.254: XP9.23 99.95,53.675 ; 99.95,60.475 101.8,62.325 101.8,63.7 109.475,71.375 v1(109.475,72.2)
UART2_RXD: XP9.21
UART2_TXD: XP9.22
UART4_RXD: XP9.12
UART4_TXD: XP9.14
UART5_RXD: R2.2 | length 10.2
  Top Layer w0.254: R2.2 110.1,95 112.625,97.525 112.625,98.725 113.275,99.375 115.17,99.375 116.445,100.65
UART5_TXD: R1.1 | length 9.8
  Top Layer w0.254: R1.1 110.1,92.8 110.825,93.525 110.825,95.025 112.4,96.6 114.935,96.6 116.445,98.11
VCC_RF: C1.1 DD1.14 R3.1 | length 4.2
  Top Layer w0.254: DD1.14 123.2,90.575 125.675,90.575 C1.1
VDD_3V3EXP: C2.1 C3.2 C5.1 C17.2 C20.1 C23.2 C24.1 DA1.1 DA1.3 DD1.8 DD2.12 R4.2 R10.1 R12.2 R13.2 R14.2 R15.2 R16.2 R17.2 R18.2 R19.2 R20.2 R21.2 R22.2 R23.2 R24.2 R26.2 R28.2 U1.7 U2.10 U2.11 U2.19 XP9.3 XP9.4 | length 341.7
  Top Layer w0.254: DA1.3 83.9,67.95 84.3,67.55 85.65,67.55 85.8,67.7 DA1.1 ; U2.19 124.2,57.95 124.75,57.4 C24.1
  Top Layer w1: 69.35,106.9 66.95,104.5 66.95,97.3 68.6,95.65 91.35,95.65 92.725,94.275 ; 69.6,106.9 69.487,107.012 70.225,107.75 72.775,107.75 73.925,106.6 73.925,104.825 75.1,103.65 77.475,103.65 78.025,104.2 78.025,106.65 79.15,107.775 80.775,107.775 82.225,106.325 82.225,104.925 83.55,103.6 85.725,103.6 86.6,104.475 86.6,106.575 87.875,107.85 90.05,107.85 90.85,107.05 90.85,104.775 92.025,103.6 94.3,103.6 94.825,104.125 94.825,106.5 95.95,107.625 98.45,107.625 99.05,107.025 99.05,105.225 100.475,103.8 103,103.8 103.3,104.1 103.3,106.65 104.4,107.75 106.425,107.75 107.025,107.15 107.025,104.9 108.6,103.325 110.925,103.325 111.65,104.05 111.65,106.575 112.825,107.75 114.275,107.75 115.2,106.825 115.2,104.725 116.7,103.225 118.95,103.225 119.825,104.1 119.825,106.4 120.975,107.55 122.925,107.55 123.725,106.75 123.725,105.2 125.55,103.375 v4(129.15,103.375) ; XP9.4 73.265,47.735 74.575,46.425 78.1,46.425 79.375,45.15 79.375,43.425 80.35,42.45 82.475,42.45 83.775,43.75 R24.2 84.5,46.75 86.575,46.75 88.35,44.975 88.35,43.55 89.25,42.65 91.2,42.65 92.1,43.55 R22.2 92.225,46.425 92.875,47.075 94.975,47.075 97.1,44.95 97.1,43.75 98.3,42.55 100.15,42.55 101.05,43.45 101.05,46.275 R14.2 101.65,46.875 104.125,46.875 105.85,45.15 105.85,43.7 106.85,42.7 108.725,42.7 109.7,43.675 R16.2 110.3,47.1 112.575,47.1 114.775,44.9 114.775,43.7 115.525,42.95 117.85,42.95 118.95,44.05 R18.2 119.5,46.925 122.175,46.925 123.325,45.775 123.325,44.1 124.4,43.025 126.725,43.025 R20.2 128.4,43.8 129.225,44.625 129.225,53.9 126.525,56.6 C24.1 ; 94.425,89.35 94.425,87.2 96.75,84.875 v1(96.75,82.15)
  Bottom Layer w1: v1(91.575,79.55) 94.15,79.55 v1(96.75,82.15) ; v1(109.425,76.925) 110.375,76.925 113.125,74.175 113.125,72.725 114.675,71.175 v1(121.35,71.175) ; v1(119.625,61.775) 121.35,63.5 v1(121.35,71.175) ; v1(126.85,56.55) 126.85,59.6 127.375,60.125 127.375,69.9 126.1,71.175 ; v4@129.175,103.375 129.175,95.725 126.1,92.65 126.1,71.175 ; v1(121.35,71.175) 126.1,71.175
VDD_5V: XP9.5 XP9.6
VDD_ADC: XP9.31
pads on no net: DD1.4 DD1.5 DD1.6 DD1.7 DD1.9 DD1.13 DD1.15 DD1.16 DD1.17 DD1.18 DD2.1 DD2.4 DD2.8 DD2.10 DD2.11 DD2.16 DD2.17 DD2.19 DD2.20 DD2.21 DD2.22 DD2.23 DD2.24 SB1.2 SB1.4 SB2.2 SB2.4 SB3.2 SB3.4 SB4.2 SB4.4 SB5.2 SB5.4 SB6.2 SB6.4 SB7.2 SB7.4 SB8.2 SB8.4 SB9.2 SB9.4 SB10.2 SB10.4 SB11.2 SB11.4 SB12.2 SB12.4 SB13.2 SB13.4 SB14.2 SB14.4 U1.11 U1.13 U1.15 U1.20 U1.22 U2.1 U2.6 U2.15 U2.16 U2.20 WA1.2 XP1.3 XP1.4 XP2.2 XP2.3 XP2.6 XP3.2 XP3.3 XP3.6 XS1.0 XS1.4 XS1.5 XS2.0 XS2.4 XS2.5

## Polygon pours and split planes (outlines as drawn)
DGND on Top Layer "Top Layer-NetD1_1" (solid, remove dead copper, pour order 12): 133.575,116.125 133.875,115.825 133.875,101.25 132.9,101.25 128.375,96.725 126.35,94.7 124.525,94.7 124.525,56.9 132.225,49.2 132.125,49.1 132.125,34.25 66.15,34.25 65.975,34.425 65.975,41.375 42.825,41.375 42.625,41.575 43.2,42.15 43.2,116.4 133.475,116.4 133.75,116.125
AGND on Top Layer "Top Layer-NetD1_1" (solid, remove dead copper, pour order 16): 38.325,122 98.425,122 101.55,118.875 101.55,38.1 93.175,29.725 48.475,29.725 34.625,43.575
DGND on Bottom Layer "Top Layer-NetD1_1" (solid, remove dead copper, pour order 14): 133.75,116.25 133.75,101.25 133.75,100.975 126.2,93.425 125.975,93.2 125.975,57 125.975,55.35 132.175,49.15 132.25,49.075 132.25,34.25 66.6,34.25 66.3,34.55 66.075,34.325 43.05,34.325 43.05,41.3 42.4,41.95 42.85,42.4 42.85,116.35 133.375,116.35 133.725,116

## Keep-outs
Keep-Out Layer:
  lines w0.254: 42.75,41.5 42.75,68.75 71.25,68.75 71.25,87.25 43.25,87.25 43.25,106.5 67.25,106.5 67.25,116.25 129.75,116.25 133.75,116.25 133.75,101.25 143.5,101.25 143.5,49 132.25,49 132.25,34.25 66,34.25 66,41.5 42.75,41.5

## Other copper
Top Layer:
  region net AGND: 56.875,88.175 60.175,88.175 60.175,87.575 56.9,87.575 56.9,88.1 56.925,88.125
  region net AUD_3.3V: 88.625,91.45 90.425,91.45 90.55,91.575 91.125,91.575 91.125,90.575 90.475,90.575 90.325,90.725 88.625,90.7
  region net VDD_3V3EXP: 113.75,86.875 108.675,86.875 108.675,87.575 113.8,87.575 113.8,86.95 113.75,86.9
  region net VDD_3V3EXP: 95.975,89.55 99.25,86.8 109.075,86.8 109.075,87.55 99.725,87.55 92.95,94.75 92.675,91.575 92.275,90.625 92.275,88.7 94.825,88.7
  region net VDD_3V3EXP: 120.125,63 122.875,63 123.325,62.55 123.325,61.7 123.075,61.7 123.075,62.175 122.925,62.325 122.825,62.225 122.825,61.675 122.55,61.675 122.55,62.1 122.45,62.2 121.5,62.2 120.4,61.1 119.05,61.1 118.6,61.55 118.6,62.225 118.9,62.525 119.65,62.525
  region net VDD_3V3EXP: 121.1,72.9 121.1,72.225 120.6,71.725 120.6,70.675 120.9,70.375 121.925,70.375 122.15,70.7 122.15,71.725 121.6,72.225 121.6,72.9
  region net VDD_3V3EXP: 108.975,78.5 108.975,77.675 108.7,77.4 108.7,76.15 108.975,75.875 108.975,75.4 109.875,75.4 109.875,75.875 110.175,76.175 110.175,77.4 109.875,77.7 109.875,78.5
  region net AGND: 68.625,92.775 83.775,92.85 84.175,92.45 84.175,91.725 84.025,91.575 74.7,91.5 74.125,91.5 73.7,91.15 72.925,90.4 72.374,89.933 72.175,89.975 70.275,89.925 70.325,91.4 69.05,92.8
  region net AUD_3.3V: 85.025,88.875 85.05,89.7 83.85,90.9 83.825,90.875 76.75,90.875 76.45,90.575 76.45,89.8 76.9,89.35 81.275,89.35 82.6,88.05 82.725,87.925 84.1,87.925 84.1,88.175 83.05,88.2 83.05,89.25 83.45,89.65 83.475,89.625 84.75,89.625 84.775,88.875
  region net AGND: 82.625,87.675 81.175,89.125 76.975,89.125 76.5,88.65 76.5,86.5 76.875,86.125 80.45,86.125 81.75,87.425 84,87.425 84,87.65 83.975,87.675
  region net VDD_3V3EXP: 87.775,83.725 87.775,77.1 85.475,74.8 85.475,68.35 86.175,68.35 86.25,68.425 86.25,74.35 88.375,76.475 91.95,76.475 92.725,77.25 92.725,79.7 89.575,82.85 88.3,82.85 88.025,83.125 88.025,83.725
  region net DGND: 126.75,92.75 131.7,92.8 132.2,93.175 138.7,93.175 139.15,92.725 139.15,86.275 138.75,85.875 132.4,85.875 131.9,86.375 131.9,87.65 132.275,88.025 132.3,88 137.425,88 137.425,91.25 137.275,91.4 137.05,91.175 130.85,91.175 130.2,91.825 126.75,91.825 126.75,92.7 126.775,92.725
  region net DGND: 126.35,94.7 126.725,94.325 126.725,91.85 126.75,91.825 126.775,91.85 127.45,91.85 127.45,95.8